# EAGLE board USB Mux-v0.1 (EAGLE 6.5.0)
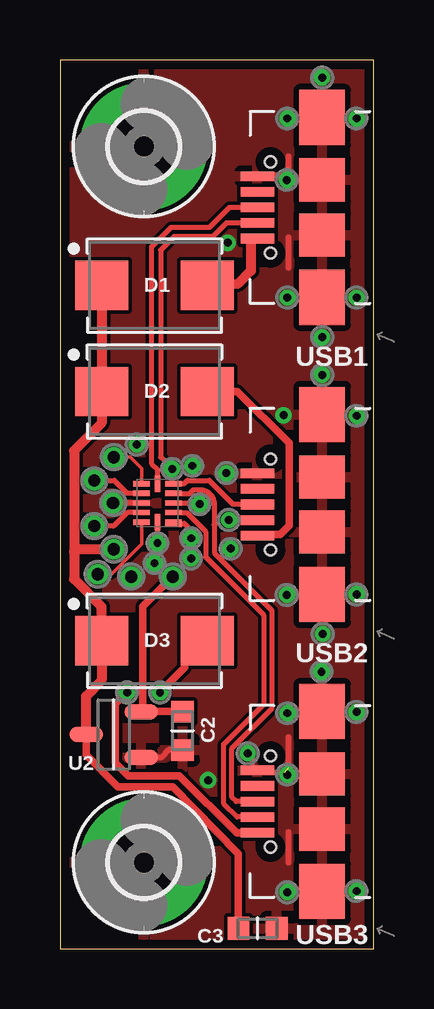
[diagram p0: board, top side]
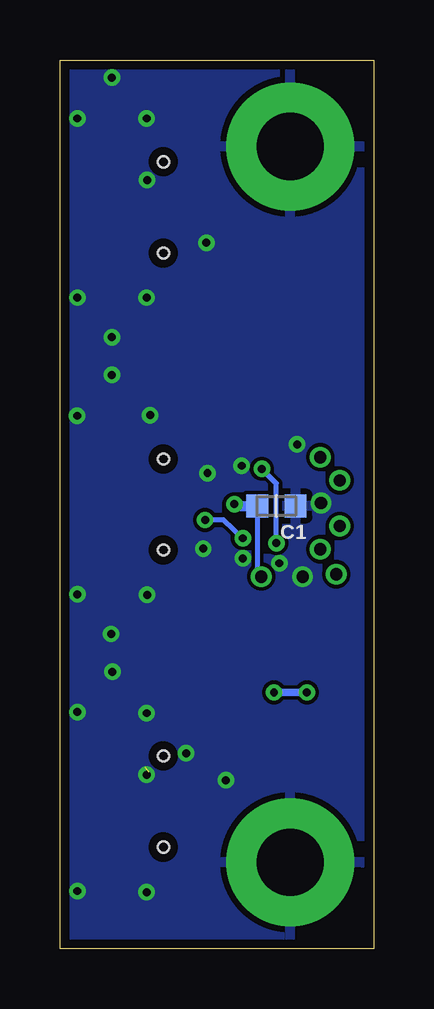
[diagram p1: board, bottom side, seen from below]

Size 13.08 x 37.06 mm. Coordinates in mm from the lower left corner, seen from the top.
Outline: 0,0 13.08,0 13.08,37.06 0,37.06 0,0
Copper layers (1*16): Top 0.0356mm / dielectric 1.5011mm / Bottom 0.0356mm
Design rules "oshpark-2layer-tented-vias": minimum track width 6mil, minimum drill 13mil, track to track 6mil, track to pad 6mil, pad to pad 6mil, via to via 6mil, smd to smd 6mil, copper to edge 15mil, drill to drill 6mil, minimum pad ring 7mil, minimum via ring 7mil, stop-mask expansion 4mil, vias tented up to drill 13mil, thermal gap 10mil
tRestrict: 1 lines

## Footprints (pad centres in the part's own frame; a part is rotated, then mirrored left to right if it is on the bottom)
CAPC1608X92N = smd 0.9 x 0.95: 1 -0.8,0; 2 0.8,0
DIOM5436X265N = smd 2.2 x 2.05: A 2.2,0; K -2.2,0
2,8-PAD = drill 2.8 pad 5.334: B2,8 0,0
UQN12 = smd 0.69 x 0.32: 1 -0.665,0.85 | smd 0.69 x 0.22: 2 -0.665,0.4; 3 -0.665,0; 4 -0.665,-0.4; 5 -0.665,-0.8; 7 0.665,-0.8; 8 0.665,-0.4; 9 0.665,0; 10 0.665,0.4; 11 0.665,0.8 | smd 0.22 x 0.69: 6 0,-0.805; 12 0,0.805
SOT95P280X135-3N = smd 1.4 x 0.65: 1 -1.15,0.95; 2 -1.15,-0.95; 3 1.15,0
USB-AB-MICRO-SMD_V03_SMT = smd 1.4 x 0.4: D+ 2.7,0; D- 2.7,0.65; GND 2.7,-1.3; ID1 2.7,-0.65; VBUS1 2.7,1.3 | smd 1.9 x 2.3: S1 0,3.75; S4 0,-3.75 | smd 1.9 x 1.8: S2 0,1.15; S3 0,-1.15 | hole 0.45: 2.15,1.9; 2.15,-1.9

## Placement (x,y rotation side)
C1  0.1uF  [CAPC1608X92N]  4.06,18.47 180 bottom
C2  1uF  [CAPC1608X92N]  5.11,9.09 90 top
C3  1uF  [CAPC1608X92N]  8.23,0.86 180 top
D1  MBRS140  [DIOM5436X265N]  3.94,27.66 0 top
D2  MBRS140  [DIOM5436X265N]  3.94,23.24 0 top
D3  MBRS140  [DIOM5436X265N]  3.94,12.85 0 top
H1  MOUNT-PAD-ROUND2.8  [2,8-PAD]  3.49,33.45 0 top
H2  MOUNT-PAD-ROUND2.8  [2,8-PAD]  3.49,3.61 0 top
U1  NCN9252  [UQN12]  4.06,18.59 180 top
U2  XC6206P332MR  [SOT95P280X135-3N]  2.24,8.94 180 top
USB1  [USB-AB-MICRO-SMD_V03_SMT]  10.92,30.91 180 top
USB2  [USB-AB-MICRO-SMD_V03_SMT]  10.92,18.53 180 top
USB3  [USB-AB-MICRO-SMD_V03_SMT]  10.92,6.15 180 top

## Library data of the parts
C1 = ipc-7351-capacitor; PARTNO: 0U1 0603
C2 C3 = ipc-7351-capacitor; PARTNO: 1UF 0603
D1-D3 = ipc-7351-diode; PARTNO: MBRS140
H1 H2 = holes; PARTNO: *
U1 = Misc Analog; PARTNO: NCN9252
U2 = Misc Power; PARTNO: XC6206P332MR
USB1-USB3 = Misc Conn; PARTNO: SMT MICRO USB CONNECTOR

## Nets
1D+: U1.6 USB1.D+
1D-: U1.12 USB1.D-
2D+: U1.5 USB2.D+
2D-: U1.1 USB2.D-
3D+: U1.4 USB3.D+
3D-: U1.2 USB3.D-
+3.3V: C1.2 C2.2 U1.3 U2.2
D+: U1.8
D-: U1.10
GND: C1.1 C2.1 C3.1 H1.B2,8 H2.B2,8 U1.9 U2.1 USB1.GND USB1.S1 USB1.S2 USB1.S3 USB1.S4 USB2.GND USB2.S1 USB2.S2 USB2.S3 USB2.S4 USB3.GND USB3.S1 USB3.S2 USB3.S3 USB3.S4
N$11: D3.A USB3.VBUS1
N$12: D2.A USB2.VBUS1
N$13: D1.A USB1.VBUS1
SEL0: U1.11
SEL1: U1.7
VCC: C3.2 D1.K D2.K D3.K U2.3

## Tracks (layer width: path | path; a pad name or v marks a point on that pad's centre or on a via)
1D+
  Top 0.203: U1.6 4.06,19.99 3.81,20.24 3.81,29.26 4.62,30.07 6.22,30.07 7.06,30.91 USB1.D+
1D-  (via drill 0.33)
  Top 0.203: v4.06,16.92 U1.12 | v4.67,20.01 4.19,20.5 4.19,29.13 4.76,29.7 6.36,29.7 6.92,30.26 USB1.D-
  Bottom 0.203: v4.06,16.92 4.06,19.41 v4.67,20.01
2D+
  Top 0.203: U1.5 5.17,19.39 5.31,19.53 6.22,19.53 7.23,18.53 USB2.D+
2D-  (via drill 0.33)
  Top 0.203: U1.1 5.17,17.74 5.46,17.45 v5.46,17.12 | v7.04,17.88 7.16,17.88 7.39,17.88 USB2.D-
  Bottom 0.203: v5.46,17.12 6.27,17.88 v7.04,17.88
3D+
  Top 0.203: U1.4 5.4,18.99 5.56,19.15 5.82,19.15 arc-90 6.43,18.54 6.43,17.68 6.45,17.65 6.45,16.48 8.84,14.1 8.84,10.03 7.16,8.36 7.16,6.32 7.34,6.15 USB3.D+
3D-
  Top 0.203: U1.2 5.28,18.19 6.07,17.4 6.07,16.33 8.48,13.92 8.48,10.19 6.81,8.51 6.81,6.07 7.38,5.5 USB3.D-
+3.3V  (via drill 0.33, 0.51)
  Top 0.203: U1.3 5.77,18.59 v5.82,18.54
  Top 0.305: v4.7,15.52 3.45,14.27 3.45,9.9 U2.2 C2.2
  Bottom 0.203: C1.2 4.86,15.68 v4.7,15.52
  Bottom 0.406: v5.82,18.54 5.74,18.47 C1.2
D+  (via drill 0.51)
  Top 0.203: v1.42,19.53 2.26,19.53 2.8,18.99 U1.8
D-  (via drill 0.51)
  Top 0.203: U1.10 2.8,18.19 2.23,17.63 v1.42,17.63
GND  (via drill 0.33, 0.51)  (1 unrouted)
  Top 0.203: U1.9 v2.21,18.59 | v7.82,8.15 8.01,7.99 8,7.44 USB3.GND 8.66,7.45 8.74,7.37 9.37,7.37 v9.47,7.26
  Top 0.254: C2.1 4.53,8.29 4.23,7.99 U2.1 | 9.53,3.61 9.53,4.88 | 9.53,7.57 9.53,8.84 | 9.53,28.4 9.53,29.67 | 9.53,33.05 9.53,32.44 9.45,32.38 9.45,32.21
  Top 0.305: USB1.GND 9.45,32.21 v9.45,32.05
  other vias: 10.95,13.13 10.92,25.5 9.47,34.62 12.36,34.62 9.47,27.15 12.36,27.15 9.32,22.25 12.37,22.23 9.47,9.83 12.36,9.88 9.45,14.76 12.36,14.78 12.36,2.41 9.47,2.36 7.11,16.69 6.93,19.84 10.92,36.32 10.92,23.93 10.9,11.56 6.99,29.44 6.17,7.04 3.94,16.08 2.97,15.52 5.51,20.14 5.46,16.28 3.2,21.03
  pour Bottom: 13.08,37.26 13.08,-0.2 0,-0.2 0,37.26
  pour Top: 0,37.26 0,-0.2 13.08,-0.2 13.08,37.26
N$11  (via drill 0.33)
  Top 0.305: USB3.VBUS1 7.37,4.85 4.98,7.21 2.85,7.21 2.31,7.75 2.31,10.21 v2.79,10.69 | D3.A 5.21,12.06 5.21,11.73 v4.17,10.69
  Bottom 0.305: v4.17,10.69 v2.79,10.69
N$12
  Top 0.305: D2.A 7.39,23.24 9.55,21.08 9.55,17.65 9.17,17.27 8.2,17.27 8.16,17.23 USB2.VBUS1
N$13
  Top 0.406: USB1.VBUS1 8.01,29.6 7.95,29.51 7.95,28.27 7.42,27.74 D1.A
SEL0  (via drill 0.51)
  Top 0.152: U1.11 3.4,16.89 2.13,15.62 v1.57,15.62
SEL1  (via drill 0.51)
  Top 0.152: v2.23,20.5 2.92,20.5 3.4,20.02 U1.7
VCC  (via drill 0.51)
  Top 0.305: C3.2 7.43,3.97 4.7,6.76 2.41,6.76 1.08,8.08 U2.3
  Top 0.406: D1.K D2.K 1.74,21.93 0.58,20.78 0.58,16.56 | U2.3 1.08,10.53 1.74,11.19 D3.K 1.74,14.26 0.58,15.42 0.58,16.56 | v2.23,16.66 0.69,16.66 0.58,16.56